# EAGLE board OsdPark#1 (EAGLE 6.4)

Size 91.44 x 43.18 mm. Coordinates in mm from the lower left corner, seen from the top.
Outline: 0,43.18 0,0 91.44,0 91.44,43.18 0,43.18
Copper layers (1*16): Top 0.0356mm / dielectric 1.5011mm / Bottom 0.0356mm
Design rules "LaenPCBOrder": minimum track width 6mil, minimum drill 13mil, track to track 6mil, track to pad 6mil, pad to pad 6mil, via to via 6mil, smd to smd 6mil, copper to edge 15mil, drill to drill 6mil, minimum pad ring 7mil, minimum via ring 7mil, stop-mask expansion 4mil, vias tented up to drill 0mil, thermal gap 10mil

## Footprints (pad centres in the part's own frame; a part is rotated, then mirrored left to right if it is on the bottom)
DIL16 = drill 0.813 long: 1 -8.89,-3.81; 2 -6.35,-3.81; 3 -3.81,-3.81; 4 -1.27,-3.81; 5 1.27,-3.81; 6 3.81,-3.81; 7 6.35,-3.81; 8 8.89,-3.81; 9 8.89,3.81; 10 6.35,3.81; 11 3.81,3.81; 12 1.27,3.81; 13 -1.27,3.81; 14 -3.81,3.81; 15 -6.35,3.81; 16 -8.89,3.81
1,6/0,8 = drill 0.813 pad 1.6 octagon: 1 0,0
MULTIWATT-15 = drill 1.2 long: 1 -8.89,-7.62; 2 -7.62,-2.54; 3 -6.35,-7.62; 4 -5.08,-2.54; 5 -3.81,-7.62; 6 -2.54,-2.54; 7 -1.27,-7.62; 8 0,-2.54; 9 1.27,-7.62; 10 2.54,-2.54; 11 3.81,-7.62; 12 5.08,-2.54; 13 6.35,-7.62; 14 7.62,-2.54; 15 8.89,-7.62
R-5 = drill 0.813 pad 1.6 octagon: 1 -2.54,0; 2 2.54,0
DO201-15 = drill 1.499 long: A 7.62,0; C -7.62,0
2,8 = hole 2.8: 0,0

## Placement (x,y rotation side)
E$1  [DIL16]  13.97,22.86 90 top
E$2  [1,6/0,8]  2.54,31.75 0 top
E$3  [1,6/0,8]  2.54,29.21 0 top
E$4  [1,6/0,8]  2.54,26.67 0 top
E$5  [1,6/0,8]  2.54,24.13 0 top
E$6  [1,6/0,8]  2.54,21.59 0 top
E$7  [1,6/0,8]  2.54,17.78 0 top
E$8  [1,6/0,8]  2.54,15.24 0 top
E$9  [1,6/0,8]  2.54,12.7 0 top
E$10  [1,6/0,8]  2.54,10.16 0 top
E$11  [1,6/0,8]  2.54,7.62 0 top
E$12  [1,6/0,8]  2.54,3.81 0 top
E$13  [MULTIWATT-15]  33.02,34.29 0 top
E$14  [1,6/0,8]  68.58,31.75 0 top
E$15  [1,6/0,8]  68.58,29.21 0 top
E$16  [1,6/0,8]  68.58,26.67 0 top
E$17  [1,6/0,8]  68.58,24.13 0 top
E$18  [1,6/0,8]  68.58,20.32 0 top
E$19  [1,6/0,8]  68.58,17.78 0 top
E$20  [1,6/0,8]  68.58,15.24 0 top
E$21  [1,6/0,8]  68.58,12.7 0 top
E$22  10K  [R-5]  12.7,7.62 0 top
E$23  [MULTIWATT-15]  33.02,11.43 0 top
E$24  [DO201-15]  57.15,31.75 0 top
E$25  [DO201-15]  57.15,29.21 0 top
E$26  [DO201-15]  57.15,26.67 0 top
E$27  [DO201-15]  57.15,24.13 0 top
E$28  [DO201-15]  57.15,20.32 0 top
E$29  [DO201-15]  57.15,17.78 0 top
E$30  [DO201-15]  57.15,15.24 0 top
E$31  [DO201-15]  57.15,12.7 0 top
E$32  [DO201-15]  80.01,31.75 0 top
E$33  [DO201-15]  80.01,29.21 0 top
E$34  [DO201-15]  80.01,26.67 0 top
E$35  [DO201-15]  80.01,24.13 0 top
E$36  [DO201-15]  80.01,20.32 0 top
E$37  [DO201-15]  80.01,17.78 0 top
E$38  [DO201-15]  80.01,15.24 0 top
E$39  [DO201-15]  80.01,12.7 0 top
E$40  [2,8]  5.08,38.1 0 top
E$41  [2,8]  86.36,5.08 0 top

## Library data of the parts
E$1 = 74xx-us
E$2-E$12 E$14-E$21 = wirepad
E$13 E$23 = st-microelectronics
E$22 = discrete
E$24-E$39 = diode
E$40 E$41 = holes

## Nets
S$1: E$1.8 E$1.13 E$2.1 E$7.1 E$13.1 E$13.8 E$13.15 E$23.1 E$23.8 E$23.15 E$32.A E$33.A E$34.A E$35.A E$36.A E$37.A E$38.A E$39.A
S$2: E$1.10 E$1.16 E$6.1 E$11.1 E$13.9 E$22.1 E$23.9
S$3: E$1.11 E$3.1 E$8.1
S$4: E$1.12 E$4.1 E$9.1
S$5: E$1.14 E$5.1
S$6: E$1.9 E$10.1
S$7: E$13.2 E$14.1 E$24.A E$32.C
S$8: E$13.3 E$15.1 E$25.A E$33.C
S$9: E$12.1 E$13.4 E$23.4 E$24.C E$25.C E$26.C E$27.C E$28.C E$29.C E$30.C E$31.C
S$10: E$1.15 E$13.5
S$11: E$13.6 E$13.11 E$22.2 E$23.6 E$23.11
S$12: E$1.1 E$13.7
S$13: E$1.2 E$13.10
S$14: E$1.3 E$13.12
S$15: E$13.13 E$16.1 E$26.A E$34.C
S$16: E$13.14 E$17.1 E$27.A E$35.C
S$17: E$18.1 E$23.2 E$28.A E$36.C
S$18: E$19.1 E$23.3 E$29.A E$37.C
S$19: E$20.1 E$23.13 E$30.A E$38.C
S$20: E$21.1 E$23.14 E$31.A E$39.C
S$21: E$1.4 E$23.5
S$22: E$1.5 E$23.7
S$23: E$1.6 E$23.10
S$24: E$1.7 E$23.12

## Tracks (layer width: path | path; a pad name or v marks a point on that pad's centre or on a via)
S$1  (18 unrouted)
S$2  (6 unrouted)
S$3  (2 unrouted)
S$4  (2 unrouted)
S$5  (1 unrouted)
S$6  (1 unrouted)
S$7  (3 unrouted)
S$8  (3 unrouted)
S$9  (10 unrouted)
S$10  (1 unrouted)
S$11  (4 unrouted)
S$12  (1 unrouted)
S$13  (1 unrouted)
S$14  (1 unrouted)
S$15  (3 unrouted)
S$16  (3 unrouted)
S$17  (3 unrouted)
S$18  (3 unrouted)
S$19  (3 unrouted)
S$20  (3 unrouted)
S$21  (1 unrouted)
S$22  (1 unrouted)
S$23  (1 unrouted)
S$24  (1 unrouted)